# EAGLE board Impulsformer (EAGLE 6.1)
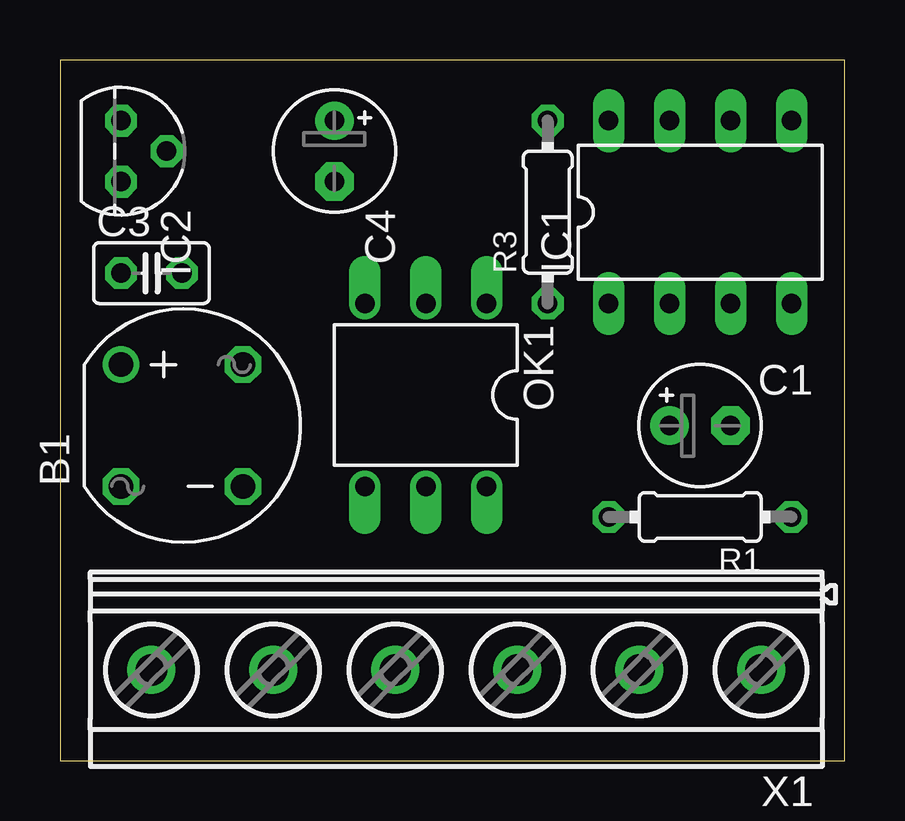
[diagram p0: board, top side]
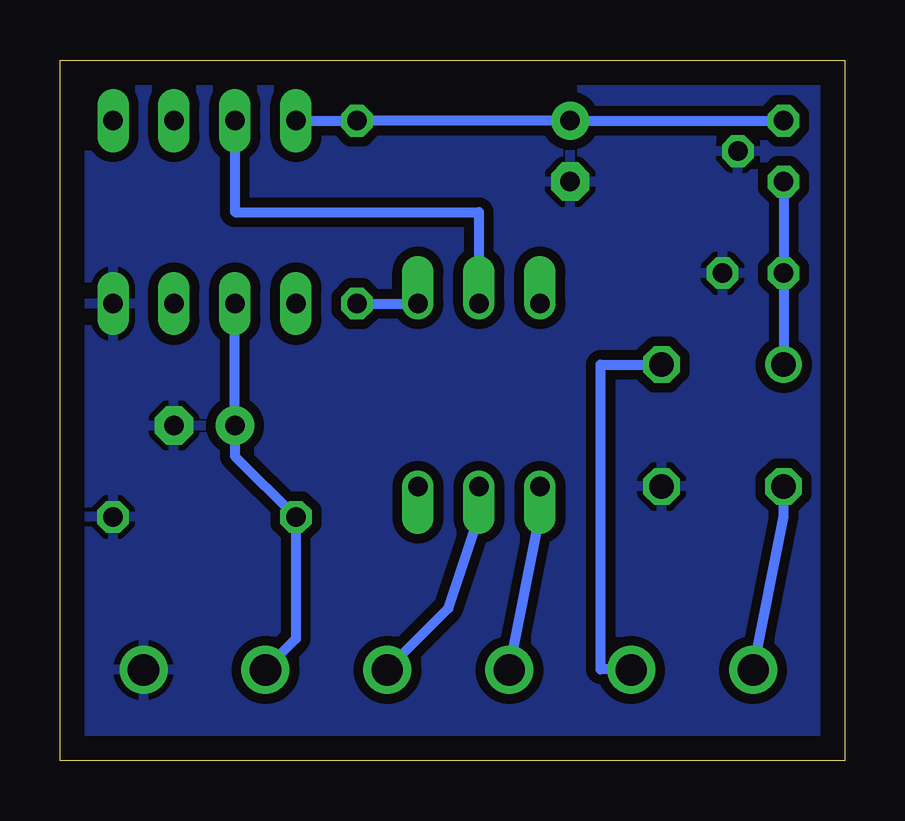
[diagram p1: board, bottom side, seen from below]

Size 32.69 x 29.2 mm. Coordinates in mm from the lower left corner, seen from the top.
Outline: 0,0 32.69,0 32.69,29.2 0,29.2 0,0
Copper layers (1*16): Top 0.035mm / dielectric 1.5mm / Bottom 0.035mm
Design rules: minimum track width 16mil, minimum drill 24mil, track to track 16mil, track to pad 16mil, pad to pad 16mil, via to via 16mil, smd to smd 8mil, copper to edge 40mil, drill to drill 16mil, minimum pad ring 10mil, minimum via ring 8mil, stop-mask expansion 4mil, vias tented up to drill 0mil, thermal gap 10mil

## Footprints (pad centres in the part's own frame; a part is rotated, then mirrored left to right if it is on the bottom)
RB1A = drill 1.016: + -2.54,2.54 | drill 1.016 octagon: - 2.54,-2.54; AC1 2.54,2.54; AC2 -2.54,-2.54
E2,5-5 = drill 0.813 pad 1.6: + -1.27,0 | drill 0.813 pad 1.6 octagon: - 1.27,0
C025-025X050 = drill 0.813 octagon: 1 -1.27,0; 2 1.27,0
DIL08 = drill 0.813 long: 1 -3.81,-3.81; 2 -1.27,-3.81; 3 1.27,-3.81; 4 3.81,-3.81; 5 3.81,3.81; 6 1.27,3.81; 7 -1.27,3.81; 8 -3.81,3.81
TO92 = drill 0.813 pad 1.27 octagon: 1 -1.27,0; 2 0,1.905; 3 1.27,0
DIL06 = drill 0.813 offset: 1 -2.54,-3.81; 2 0,-3.81; 3 2.54,-3.81; 4 2.54,3.81; 5 0,3.81; 6 -2.54,3.81
0204/7 = drill 0.813 octagon: 1 -3.81,0; 2 3.81,0
MKDSN1,5/6-5,08 = drill 1.3 pad 2: 1 -12.7,0.025; 2 -7.62,0.025; 3 -2.54,0.025; 4 2.54,0.025; 5 7.62,0.025; 6 12.7,0.025

## Placement (x,y rotation side)
B1  [RB1A]  5.08,13.97 0 top
C1  1uF  [E2,5-5]  26.67,13.97 0 top
C3  100nF  [C025-025X050]  3.81,20.32 0 top
C4  10uF  [E2,5-5]  11.43,25.4 270 top
IC1  TINY13-20PU  [DIL08]  26.67,22.86 0 top
IC2  LM2936Z-5.0  [TO92]  2.54,25.4 270 top
OK1  CNY17  [DIL06]  15.24,15.24 180 top
R1  1k91  [0204/7]  26.67,10.16 180 top
R3  150  [0204/7]  20.32,22.86 90 top
X1  MKDSN1,5/6-5,08  [MKDSN1,5/6-5,08]  16.51,3.81 180 top

## Library data of the parts
B1 = rectifier
C1 C3 C4 R1 R3 = rcl
IC1 = atmel; MPN: ATTINY13-20PU; OC_FARNELL: 9171550; OC_NEWARK: 96K6521
IC2 = national-semiconductor; MF: NATIONAL SEMICONDUCTOR; MPN: LM2936Z-5.0/NOPB; OC_FARNELL: 1150143; OC_NEWARK: 41K4533
OK1 = optocoupler; MPN: CNY17-1; OC_FARNELL: 1045399; OC_NEWARK: 05M4044
X1 = con-phoenix-508; MPN: SMKDSN1,5/6-5,08; OC_FARNELL: 1792907; OC_NEWARK: 70R0302

## Nets
+5V: C4.+ IC1.8 IC2.1 R3.2
GND: B1.- C1.- C3.2 C4.- IC1.4 IC2.2 R1.1 X1.1
N$1: B1.+ C3.1 IC2.3
N$2: C1.+ IC1.2 R1.2 X1.2
N$3: IC1.7 OK1.2
N$4: OK1.1 R3.1
N$5: OK1.5 X1.3
N$6: OK1.4 X1.4
N$7: B1.AC2 X1.6
N$8: B1.AC1 X1.5

## Tracks (layer width: path | path; a pad name or v marks a point on that pad's centre or on a via)
+5V
  Bottom 0.406: IC1.8 R3.2 C4.+ IC2.1
GND
  pour Bottom: 0,29.21 31.75,29.21 31.75,0 0,0
N$1
  Bottom 0.406: IC2.3 C3.1 B1.+
N$2
  Bottom 0.406: IC1.2 C1.+ 25.4,12.7 R1.2 22.86,5.08 24.13,3.81 X1.2
N$3
  Bottom 0.406: OK1.2 15.24,22.86 25.4,22.86 IC1.7
N$4
  Bottom 0.406: R3.1 OK1.1
N$5
  Bottom 0.406: OK1.5 15.24,10.16 16.51,6.35 19.05,3.81 X1.3
N$6
  Bottom 0.406: OK1.4 12.7,10.16 X1.4
N$7
  Bottom 0.406: B1.AC2 2.54,10.16 X1.6
N$8
  Bottom 0.406: B1.AC1 10.16,16.51 10.16,3.81 8.89,3.81 X1.5